# Altium PCB JTAG_to_HDMI_2.PcbDoc
Units mm, origin at the board's own origin, x right, y up, seen from the top; angles counter-clockwise.
Board outline 29.3 x 33.5 mm, 2 copper layers (Top Layer, Bottom Layer); 4 components, 8 nets, 51 pads, 5 vias.
Unrouted connection lines stored in the file: 4.
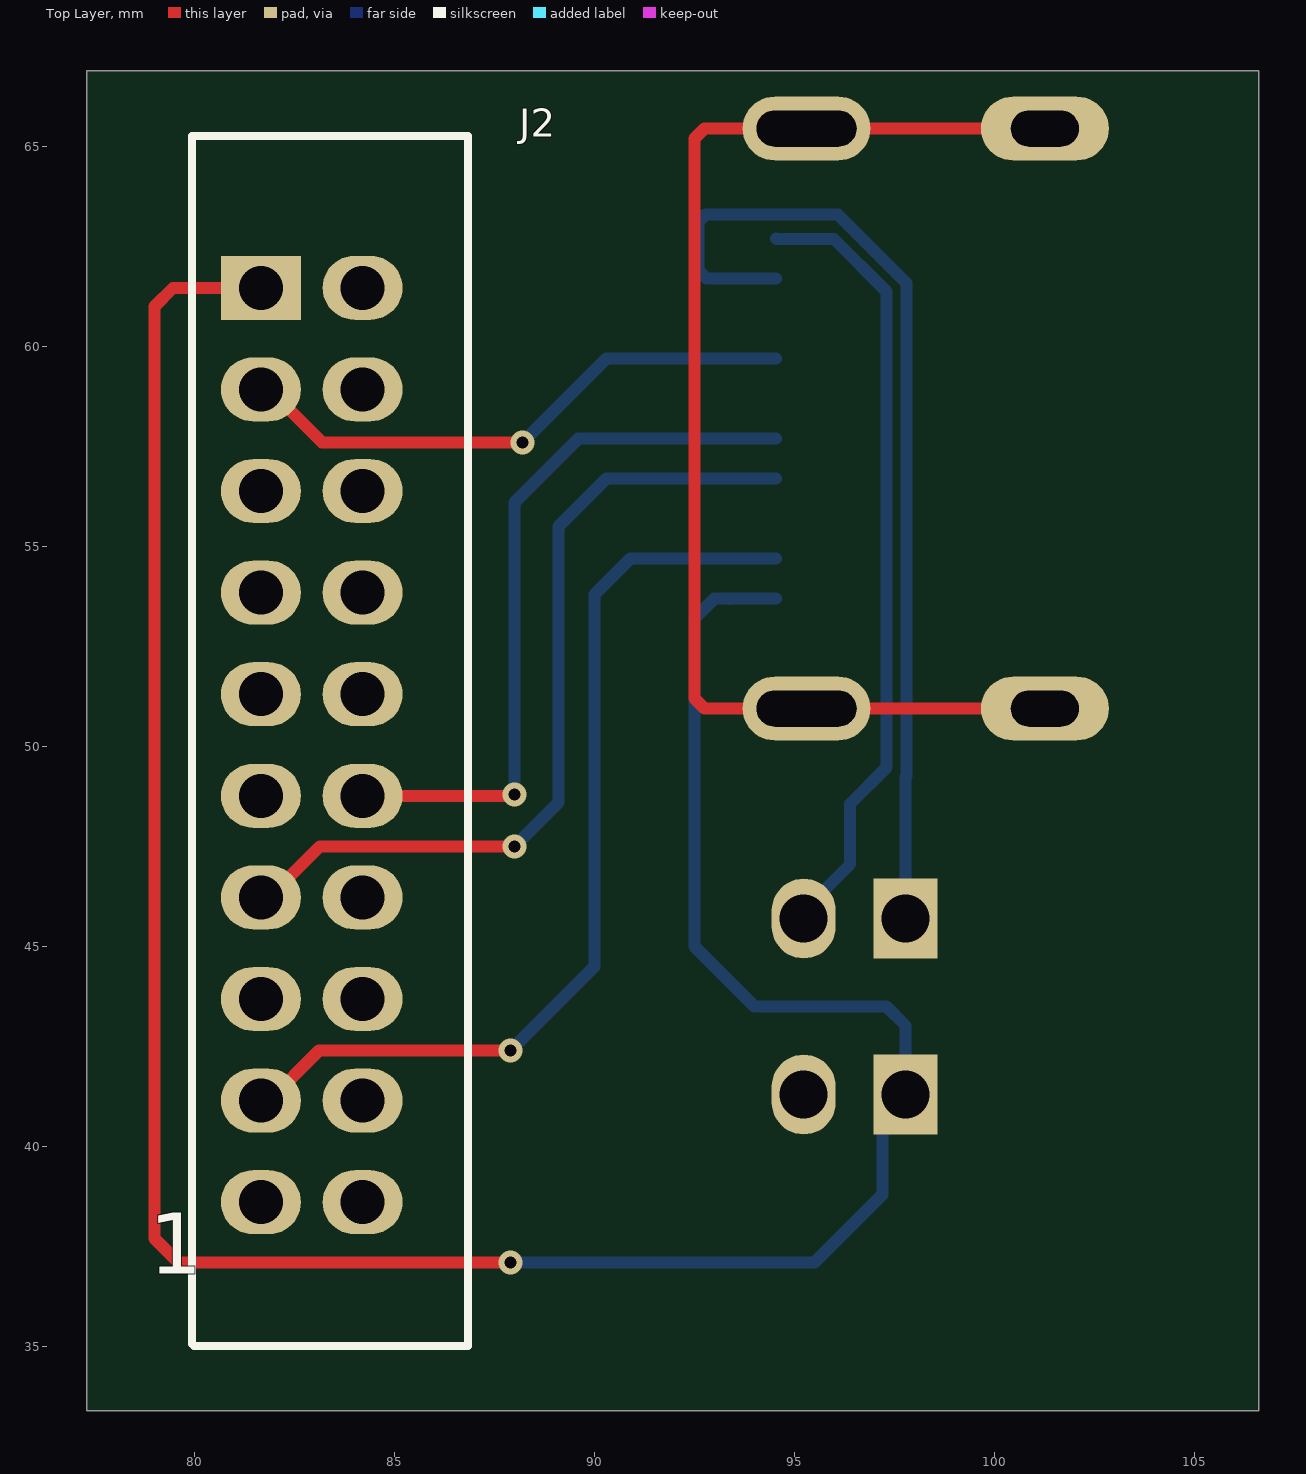
[diagram p0: Top Layer view]
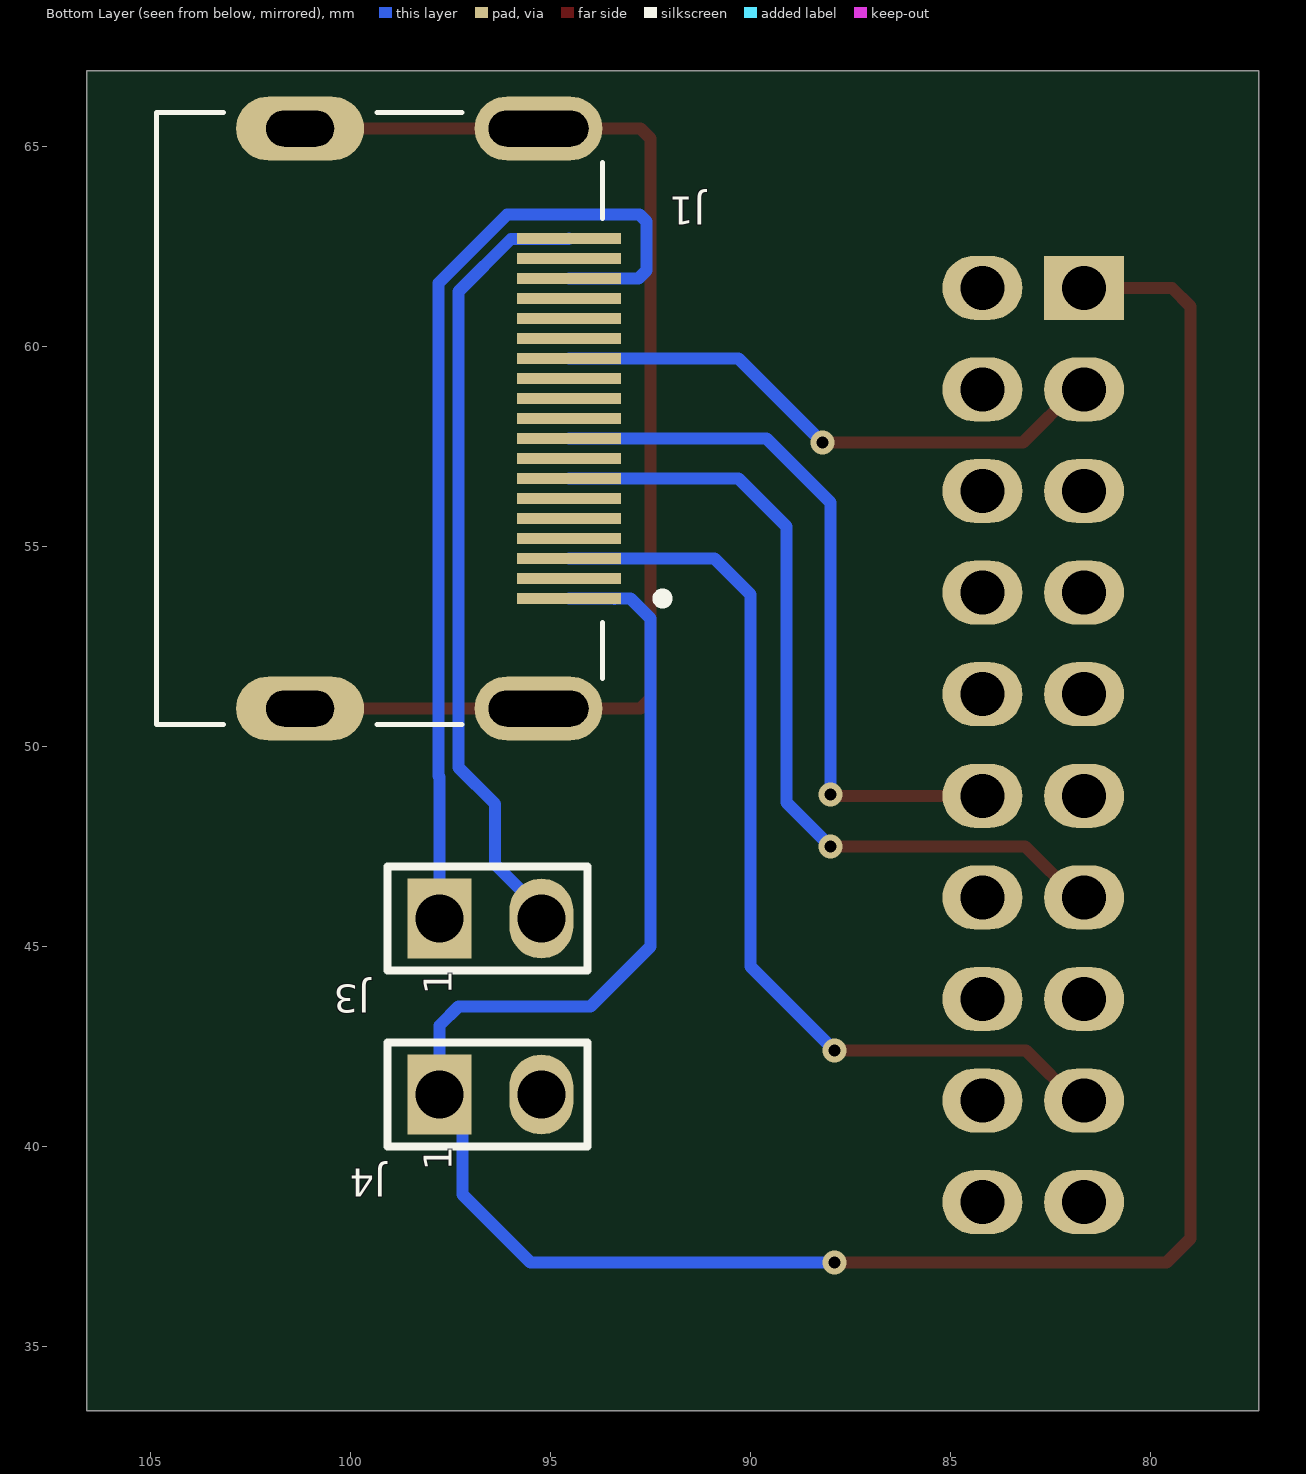
[diagram p1: Bottom Layer view, seen from below]

## Layer stack, top to bottom
Top Solder: solder mask 0.0102, Solder Resist, Dk 3.5
Top Layer: signal copper 0.0356
Dielectric 1: dielectric 0.32, FR-4, Dk 4.8
Bottom Layer: signal copper 0.0356
Bottom Solder: solder mask 0.0102, Solder Resist, Dk 3.5

## Board outline
77.3,33.4 106.6,33.4 106.6,66.9 77.3,66.9

## Design rules (kind name [scope] priority, off if disabled: settings)
Clearance [All] p1: gap=0.2 ignorepadtopadclearanceinfootprint=FALSE
HoleToHoleClearance [All] p1: gap=0 allowstackedmicrovias=TRUE
MinimumSolderMaskSliver [All] p1: minsoldermaskwidth=0.01
PolygonConnect [All] p1: connectstyle=Relief reliefconductorwidth=0.254 reliefentries=4 polygonreliefangle="90 Angle" airgapwidth=0.254
RoutingVias [All] p1: holewidth=0.3 width=0.6 viastyle="Through Hole" minholewidth=0.3 minwidth=0.6 maxholewidth=0.3 maxwidth=0.6
SilkToSolderMaskClearance [IsPad] p1: minsilkscreentomaskgap=0.1 clearancetoexposedcopper=TRUE
SolderMaskExpansion [All] p1: expansion=0.102 istentingtop=FALSE
Width [All] p1: maxlimit=1 minlimit=0.3 preferedwidth=0.5
27 further rules are at their usual default settings.

## Components (designator, comment, footprint, x,y, rotation, side; value= is the part's Value field where it differs from the comment)
J1 "RAHHD19TR" SWITCHCRAFT_RAHHD19TR 97.9,58.2 r270 bottom
J2 "SBH11-PBPC-D10-ST-BK" SBH11-PBPC-D10-ST-BK 81.661,61.468 r0 top
J3 "1x2 header (Rx/Tx)" DS1021-1*2SF1-1 96.5,45.7 r90 bottom
J4 "1x2 header (VCC/GND)" DS1021-1*2SF1-1 96.5,41.3 r90 bottom

## Footprints (in the part's own frame and the unit in brackets; to place one, negate y for a bottom-side part, rotate by r counter-clockwise, add the part's x,y. Pads: shape width x height; smd on the part's side, far side on the other; paste and mask are expansions set on the pad)
DS1021-1*2SF1-1 [mm]
  rect 2x1.6 hole 1.2: 1(0,1.27) 1(0,1.27)
  oval 2x1.6 hole 1.2: 2(0,-1.27) 2(0,-1.27)
  silkscreen extent -1.3,-2.43 1.3,2.57, body extent -1.17,-2.47 1.47,2.64, height 5.51
SBH11-PBPC-D10-ST-BK [mm]
  oval 2x1.6 hole 1.1: 1(0,-22.86) 2(2.54,-22.86) 3(0,-20.32) 4(2.54,-20.32) 5(0,-17.78) 6(2.54,-17.78) 7(0,-15.24) 8(2.54,-15.24) 9(0,-12.7) 10(2.54,-12.7) 11(0,-10.16) 12(2.54,-10.16) 13(0,-7.62) 14(2.54,-7.62) 15(0,-5.08) 16(2.54,-5.08) 17(0,-2.54) 18(2.54,-2.54) 20(2.54,0)
  rect 2x1.6 hole 1.1: 19(0,0)
  silkscreen extent -1.73,-26.45 5.17,3.8, body extent -2.65,-26.56 4.45,3.76, height 8.51
SWITCHCRAFT_RAHHD19TR [mm]
  rect 0.28x2.6 smd: 1(4.5,3.36) 2(4,3.36) 3(3.5,3.36) 4(3,3.36) 5(2.5,3.36) 6(2,3.36) 7(1.5,3.36) 8(1,3.36) 9(0.5,3.36) 10(0,3.36) 11(-0.5,3.36) 12(-1,3.36) 13(-1.5,3.36) 14(-2,3.36) 15(-2.5,3.36) 16(-3,3.36) 17(-3.5,3.36) 18(-4,3.36) 19(-4.5,3.36)
  oval 1.6x3.2 hole 0.9 slot 2.5 at 90 deg: SH1(-7.25,2.6) SH2(7.25,2.6)
  oval 1.6x3.2 hole 0.9 slot 1.7 at 90 deg: SH3(-7.25,-3.36) SH4(7.25,-3.36)
  silkscreen extent -7.65,-6.95 7.65,5.8, body extent -7.6,-7.97 7.7,4.17, height 6.17

## Part data
J1: "HDMI HDMI 2.0 Receptacle Connector 19 Position Surface Mount, Right Angle; Through Hole", Package=None, Availability="In Stock", Check_prices=https://www.snapeda.com/parts/RAHHD19TR/Switchcraft+%252F+Conxall/view-part/?ref=eda, ComponentLink1Description="Chipdip link", ComponentLink1URL=https://www.chipdip.ru/product0/8007174530, MF="Switchcraft Inc.", MP=RAHHD19TR, Price=None, Purchase-URL=https://pricing.snapeda.com/search/part/RAHHD19TR/?ref=eda, SnapEDA_Link=https://www.snapeda.com/parts/RAHHD19TR/Switchcraft+%252F+Conxall/view-part/?ref=snap, Supplier 1=https://www.chipdip.ru/product0/8007174530
J2: "Conn Shrouded Header (4 Sides) HDR 20 POS 2.54mm Solder ST Top Entry Thru-Hole", Manufacturer=Sullins, Supplier Part Number=S9172-ND, Category=Connectors, ComponentLink1Description=https://datasheet.ciiva.com/730/sbh11-pbpc-dxx-st-xx-730919.pdf?src-supplier=Digikey, ComponentLink1URL=https://datasheet.ciiva.com/730/sbh11-pbpc-dxx-st-xx-730919.pdf?src-supplier=Digikey, ComponentLink2Description="Chipdip link", ComponentLink2URL=https://www.chipdip.ru/product0/8005812384, Manufacturer Part Number=SBH11-PBPC-D10-ST-BK, Pricing="1=0,65, 10=0,496, 80=0,38963, 440=0,32211, 945=0,29663, 4900=0,25024, 10000=0,2457 (USD)", RoHS=Yes, Stock=20189, Supplier=Digikey, Supplier 1=https://www.chipdip.ru/product0/8005812384
J3: library part DS1021-1*2SF1-1_1, Manufacturer="Ningbo Connfly Electric", Manufacturer Part Number=DS1021-1*2SF1-1, Supplier Part Number=1390105, ComponentLink1Description="Chipdip link", ComponentLink1URL=https://www.chipdip.ru/product0/8009330828, Pricing="1=0,11 (EUR)", RoHS=No, Supplier=Conrad, Supplier 1=https://www.chipdip.ru/product0/8009330828
J4: library part DS1021-1*2SF1-1, Manufacturer="Ningbo Connfly Electric", Supplier Part Number=1390105, ComponentLink1Description="Chipdip link", ComponentLink1URL=https://www.chipdip.ru/product0/8009330828, Manufacturer Part Number=DS1021-1*2SF1-1, Pricing="1=0,11 (EUR)", RoHS=No, Supplier=Conrad, Supplier 1=https://www.chipdip.ru/product0/8009330828

## Via types
v1: diameter 0.6, hole 0.3, Top Layer to Bottom Layer, tented both sides, 5 vias

## Nets (pads, with @x,y where several pads share a name; then routed paths per layer and width w, separated by ;. In a path a pad name is that pad's centre, name@x,y a point inside that pad or via, vN(x,y) a via of type N, cw(c..) or ccw(c..) an arc to the next point about the centre after c; other vN are vias at no path point)
RESET: J1.9 J2.15 | length 18.3
  Top Layer w0.3: 84.201,48.768 v1@87.968,48.768
  Top Layer w0.381: v1@87.968,48.768 v1(88,48.8)
  Bottom Layer w0.3: v1(88,48.8) 88,56.1 89.6,57.7 J1.9
Rx: J1.17 J3.1 | length 25.1
  Bottom Layer w0.3: J1.17 92.8,61.7 92.6,61.9 92.6,63.124 92.776,63.3 96.082,63.3 97.8,61.582 97.8,49.269 97.77,49.239 J3.1@97.77,45.7
SWCLK: J1.3 J2.9 | length 23.9
  Top Layer w0.3: 81.661,41.148 81.861,41.148 83.113,42.4 v1(87.9,42.4)
  Bottom Layer w0.3: v1(87.9,42.4) 90,44.5 90,53.8 90.9,54.7 J1.3
SWDIO: J1.7 J2.7 | length 21.3
  Top Layer w0.3: J2.7@81.861,46.228 83.133,47.5 v1(88,47.5)
  Top Layer w0.381: J2.7 J2.7@81.861,46.228
  Bottom Layer w0.3: v1(88,47.5) 89.1,48.6 89.1,55.5 90.3,56.7 J1.7
  Bottom Layer w0.381: J2.7 81.661,46.261 J2.7@81.7,46.3
Tx: J1.19 J3.2 | length 20
  Bottom Layer w0.3: J1.19 94.55,62.69 95.985,62.69 97.3,61.375 97.3,49.476 96.389,48.565 96.389,47.059 95.23,45.9 95.23,45.7 J3.2@95.37,45.7
V_1: J1.SH1 J1.SH2 J1.SH3 J1.SH4 | length 31.7
  Top Layer w0.3: J1.SH4 J1.SH2 92.75,50.95 92.5,51.2 92.5,65.2 92.75,65.45 J1.SH1 J1.SH3
VCC: J1.1 J2.1 J4.1 | length 67.5
  Top Layer w0.3: 81.661,61.468 79.468,61.468 79,61 79,37.7 79.6,37.1 v1(87.9,37.1)
  Bottom Layer w0.3: v1(87.9,37.1) 95.5,37.1 97.2,38.8 97.2,40.73 97.77,41.3 97.77,43.03 97.3,43.5 94,43.5 92.5,45 92.5,53.2 93,53.7 J1.1 93.41,53.7 J1.1@93.4,53.69
VCC_2: J1.13 J2.2 | length 14.3
  Top Layer w0.3: 81.861,58.928 83.189,57.6 v1(88.2,57.6)
  Top Layer w0.381: 81.661,58.928 81.861,58.928
  Bottom Layer w0.3: v1(88.2,57.6) 90.3,59.7 J1.13
pads on no net: J1.2 J1.4 J1.5 J1.6 J1.8 J1.10 J1.11 J1.12 J1.14 J1.15 J1.16 J1.18 J2.3 J2.4 J2.5 J2.6 J2.8 J2.10 J2.11 J2.12 J2.13 J2.14 J2.16 J2.17 J2.18 J2.19 J2.20 J4.2

## Text inside footprints (layer, text, board x,y; h text height)
J2: Top Overlay "1" at 78.865,36.822 h1.52
J3: Bottom Overlay "1" at 97.47,43.8 h0.7 r270
J4: Bottom Overlay "1" at 97.47,39.4 h0.7 r270